# EAGLE board display (EAGLE 4.16)
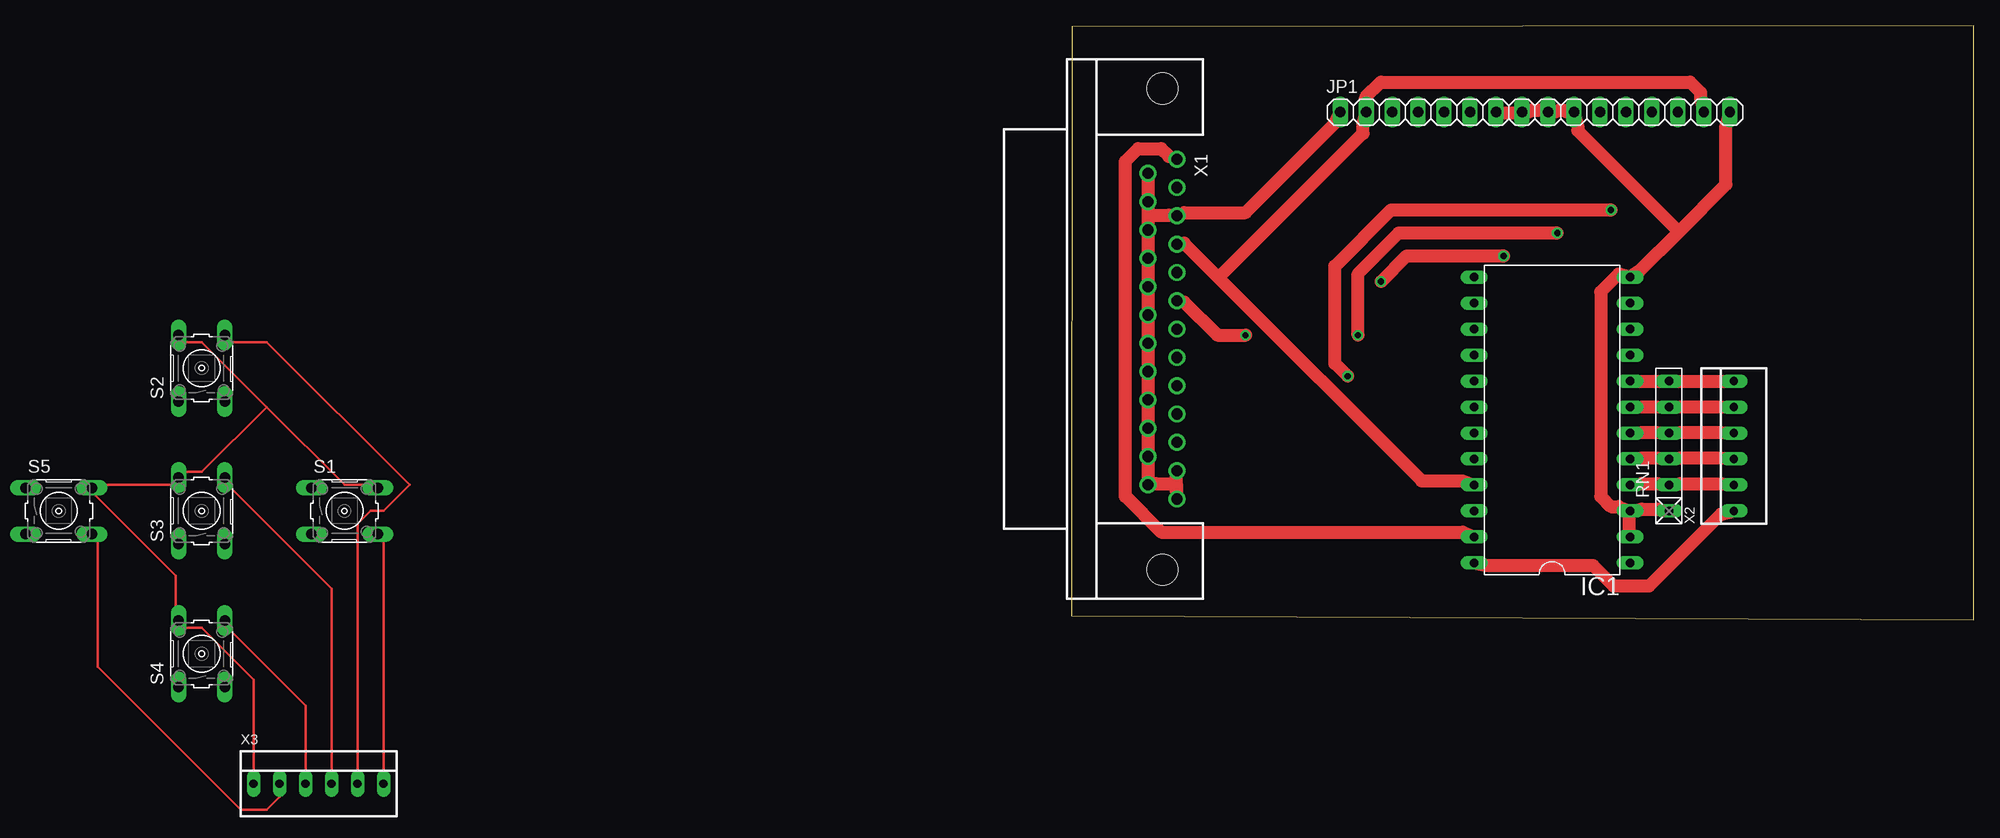
[diagram p0: board, top side]
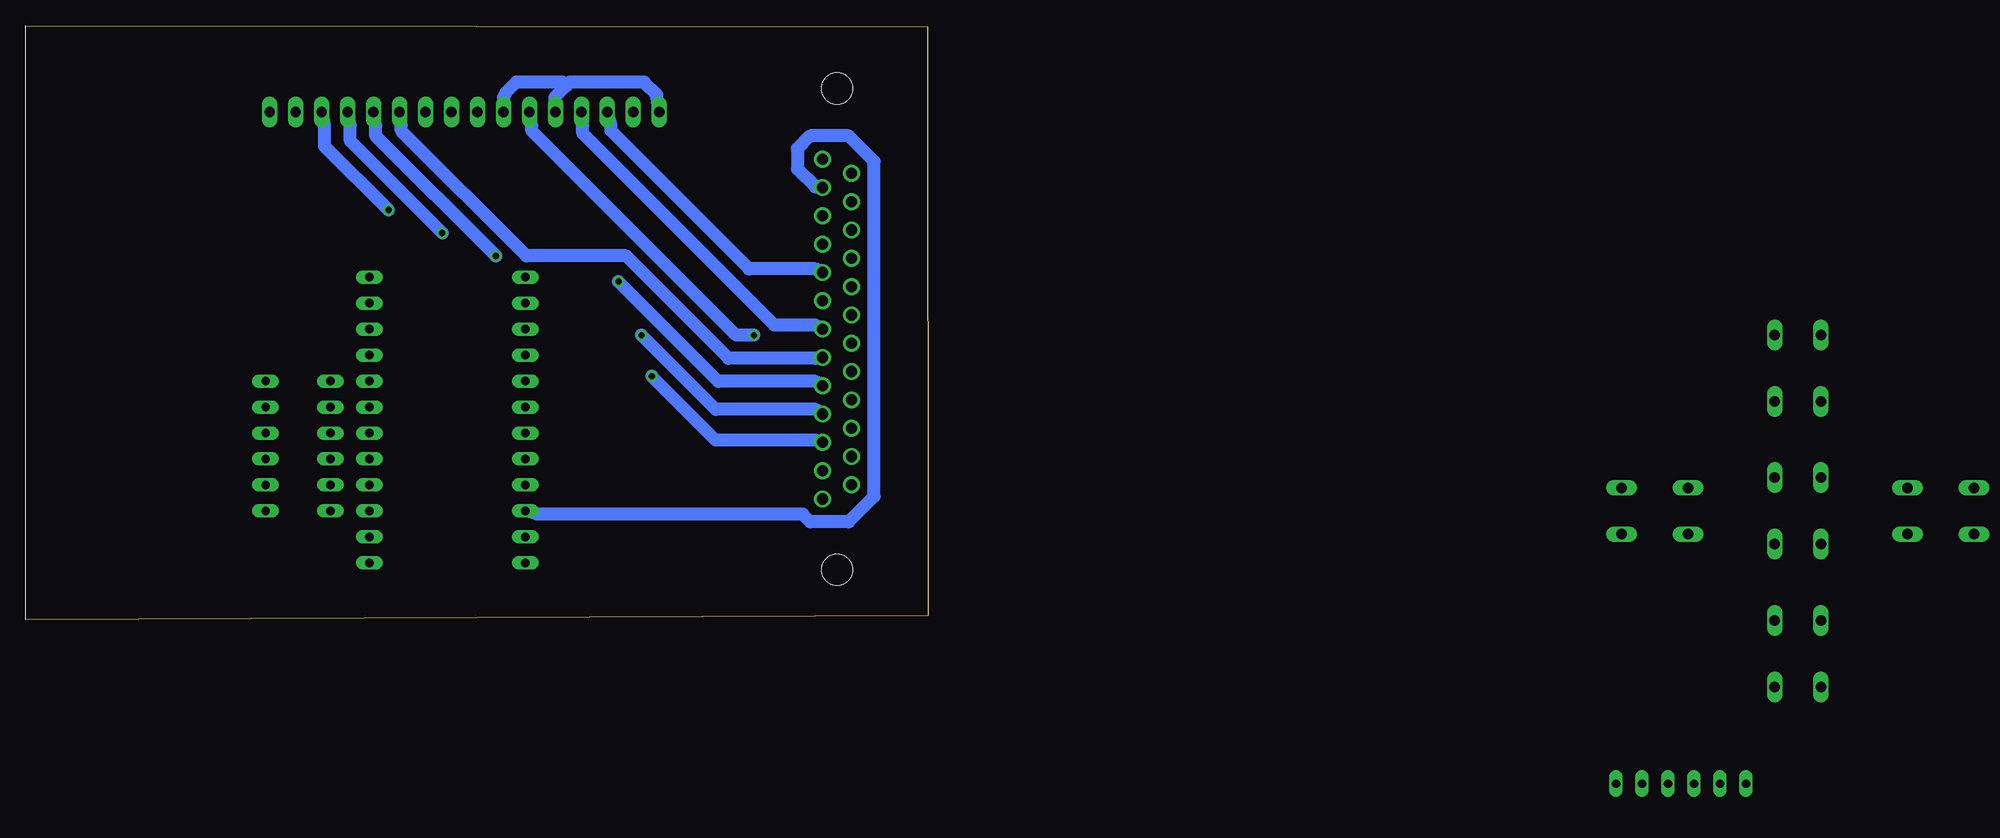
[diagram p1: board, bottom side, seen from below]

Size 88.28 x 58.09 mm. Coordinates in mm from the lower left corner, seen from the top.
Outline: 0,0.4 88.28,0 88.28,58.09 0.07,57.99 0,0.4
Copper layers (1*16): Top 0.035mm / dielectric 1.5mm / Bottom 0.035mm
Design rules "default": minimum track width 50mil, minimum drill 24mil, track to track 30mil, track to pad 30mil, pad to pad 30mil, via to via 30mil, smd to smd 20mil, copper to edge 20mil, drill to drill 20mil, minimum pad ring 10mil, minimum via ring 8mil, stop-mask expansion 4mil, vias tented up to drill 0mil, thermal gap 20mil

## Footprints (pad centres in the part's own frame; a part is rotated, then mirrored left to right if it is on the bottom)
DIL24-6 = drill 0.813 long: 1 -13.97,-7.62; 2 -11.43,-7.62; 3 -8.89,-7.62; 4 -6.35,-7.62; 5 -3.81,-7.62; 6 -1.27,-7.62; 7 1.27,-7.62; 8 3.81,-7.62; 9 6.35,-7.62; 10 8.89,-7.62; 11 11.43,-7.62; 12 13.97,-7.62; 13 13.97,7.62; 14 11.43,7.62; 15 8.89,7.62; 16 6.35,7.62; 17 3.81,7.62; 18 1.27,7.62; 19 -1.27,7.62; 20 -3.81,7.62; 21 -6.35,7.62; 22 -8.89,7.62; 23 -11.43,7.62; 24 -13.97,7.62
1X16 = drill 1.016 long: 1 -19.05,0; 2 -16.51,0; 3 -13.97,0; 4 -11.43,0; 5 -8.89,0; 6 -6.35,0; 7 -3.81,0; 8 -1.27,0; 9 1.27,0; 10 3.81,0; 11 6.35,0; 12 8.89,0; 13 11.43,0; 14 13.97,0; 15 16.51,0; 16 19.05,0
RN-6 = drill 0.813 long: 1 -6.35,0; 2 -3.81,0; 3 -1.27,0; 4 1.27,0; 5 3.81,0; 6 6.35,0
B3F-10XX = drill 1.016 long: 1 -3.251,2.261; 2 3.251,2.261; 3 -3.251,-2.261; 4 3.251,-2.261
H3M25RA = drill 1.092 round: 1 -16.612,1.422; 2 -13.843,1.422; 3 -11.074,1.422; 4 -8.306,1.422; 5 -5.537,1.422; 6 -2.769,1.422; 7 0,1.422; 8 2.769,1.422; 9 5.537,1.422; 10 8.306,1.422; 11 11.074,1.422; 12 13.843,1.422; 13 16.612,1.422; 14 -15.227,-1.422; 15 -12.459,-1.422; 16 -9.69,-1.422; 17 -6.921,-1.422; 18 -4.153,-1.422; 19 -1.384,-1.422; 20 1.384,-1.422; 21 4.153,-1.422; 22 6.921,-1.422; 23 9.69,-1.422; 24 12.459,-1.422; 25 15.227,-1.422 | hole 3.048: -23.52,0; 23.52,0
22-23-2061 = drill 0.813 long: 1 -6.35,0; 2 -3.81,0; 3 -1.27,0; 4 1.27,0; 5 3.81,0; 6 6.35,0

## Placement (x,y rotation side)
IC1  PCA9555N  [DIL24-6]  47.02,19.52 90 top
JP1  [1X16]  45.35,49.63 0 top
RN1  [RN-6]  58.45,16.98 90 top
S1  [B3F-10XX]  -71.09,10.63 0 top  (outside the outline)
S2  [B3F-10XX]  -85.06,24.6 90 top  (outside the outline)
S3  [B3F-10XX]  -85.06,10.63 90 top  (outside the outline)
S4  [B3F-10XX]  -85.06,-3.34 90 top  (outside the outline)
S5  [B3F-10XX]  -99.03,10.63 0 top  (outside the outline)
X1  D-SUB25-H3M25RA  [H3M25RA]  8.92,28.41 270 top
X2  [22-23-2061]  64.8,16.98 90 top
X3  [22-23-2061]  -73.63,-16.04 0 top  (outside the outline)

## Library data of the parts
IC1 = micro-philips
JP1 = pinhead
RN1 = resistor-net
S1-S5 = switch-omron
X1 = con-thomas-betts
X2 X3 = con-molex

## Nets
+5V: IC1.24 X2.1
CONTRASTO: JP1.3 X1.5
DATA4: JP1.11 X1.8
DATA5: JP1.12 X1.9
DATA6: JP1.13 X1.10
DATA7: JP1.14 X1.11
E: JP1.6 X1.6
GND: IC1.2 IC1.3 IC1.12 JP1.1 JP1.5 JP1.7 JP1.8 JP1.9 JP1.10 JP1.16 RN1.1 X1.3 X1.12 X1.13 X1.14 X1.15 X1.16 X1.17 X1.18 X1.19 X1.20 X1.21 X1.22 X1.23 X1.24 X1.25
N$1: S1.2 S2.2 S3.2 S4.2 S5.2 X3.1
N$5: S5.4 X3.2
N$6: S4.4 X3.3
N$7: S3.4 X3.4
N$8: S2.4 X3.5
N$9: S1.4 X3.6
N$23: IC1.4 RN1.2 X2.2
N$30: IC1.5 RN1.3 X2.3
N$44: IC1.6 RN1.4 X2.4
N$45: IC1.7 RN1.5 X2.5
N$46: IC1.8 RN1.6 X2.6
RS: JP1.4 X1.7
SCL: IC1.22 X1.2
SDA: IC1.23 X1.1
VCC: IC1.21 JP1.2 JP1.15 X1.4

## Tracks (layer width: path | path; a pad name or v marks a point on that pad's centre or on a via)
+5V
  Top 1.27: IC1.24 40.53,5.31 51.03,5.31 53.03,3.31 56.53,3.31 63.53,10.31 X2.1
CONTRASTO
  Bottom 1.27: JP1.3 31.03,48.31 31.03,47.81 17.53,34.31 11.03,34.31 X1.5
DATA4
  Bottom 1.27: JP1.11 51.53,48.31 51.53,47.81 39.28,35.56 29.53,35.56 19.53,25.56 11.03,25.56 X1.8
DATA5  (via drill 0.61)
  Top 1.27: v42.28,35.56 32.78,35.56 v30.28,33.06
  Bottom 1.27: v42.28,35.56 54.03,47.31 54.03,48.31 JP1.12 | v30.28,33.06 20.53,23.31 11.03,23.31 X1.9
DATA6  (via drill 0.61)
  Top 1.27: v47.53,37.81 32.03,37.81 28.03,33.81 v28.03,27.81
  Bottom 1.27: v47.53,37.81 56.53,46.81 56.53,48.31 JP1.13 | v28.03,27.81 20.78,20.56 11.03,20.56 X1.10
DATA7  (via drill 0.61)
  Top 1.27: v52.78,40.06 31.28,40.06 25.78,34.56 25.78,25.06 v27.03,23.81
  Bottom 1.27: v52.78,40.06 59.03,46.31 59.03,48.31 JP1.14 | v27.03,23.81 20.78,17.56 11.03,17.56 X1.11
E  (via drill 0.61)
  Top 1.27: v17.03,27.81 14.28,27.81 11.03,31.06 X1.6
  Bottom 1.27: v17.03,27.81 18.78,27.81 38.78,47.81 38.78,48.31 JP1.6
GND
  Top 1.27: JP1.7 42.28,49.56 43.53,49.56 JP1.8 44.53,49.56 45.03,49.81 45.78,49.81 46.38,50 JP1.9 47.33,49.66 47.78,49.81 48.53,49.81 | 10.28,13.31 10.28,13.81 X1.12 | 10.28,13.31 10.28,12.56 X1.13 | 10.28,13.31 8.28,13.31 X1.25 7.53,13.81 7.53,15.31 X1.24 7.53,16.56 7.53,18.06 X1.23 7.53,19.31 7.53,20.81 X1.22 7.53,22.06 7.53,23.56 X1.21 7.53,25.06 7.53,26.31 X1.20 7.53,27.81 7.53,29.06 X1.19 7.53,30.56 7.53,31.81 X1.18 7.53,33.31 7.53,34.56 X1.17 7.53,36.06 7.53,37.31 X1.16 7.53,38.81 7.53,39.56 | 7.53,39.56 7.53,40.06 X1.15 7.53,41.56 7.53,43.06 X1.14 | 7.53,39.56 9.53,39.56 X1.3 11.03,39.81 17.03,39.81 25.78,48.56 JP1.1 | IC1.3 54.78,10.56 54.53,10.06 54.53,8.56 54.78,8.06 IC1.2 | IC1.3 55.78,10.81 57.28,10.81 RN1.1 | 48.53,49.81 48.43,49.66 | 48.53,49.81 JP1.10 49.53,48.31 49.53,47.81 59.41,37.94 | IC1.3 53.53,11.06 52.78,11.06 51.78,12.06 51.78,32.06 53.53,33.81 IC1.12 55.53,34.06 59.41,37.94 | 59.41,37.94 64.03,42.56 64.03,48.31 JP1.16
  Bottom 1.27: JP1.7 41.53,51.06 41.28,51.56 40.28,52.56 35.78,52.56 35.41,52.19 | 35.41,52.19 36.53,51.06 JP1.5 | 35.41,52.19 35.03,52.56 27.78,52.56 26.53,51.31 26.53,51.06 JP1.1
N$1
  Top 0.254: X3.1 -79.98,-5.88 -85.06,-0.8 -87.6,-0.8 S4.2 -87.6,0.47 -87.6,4.28 -96.49,13.17 S5.2 -95.22,13.17 -87.6,13.17 S3.2 -87.6,14.44 -85.06,14.44 -78.71,20.79 | -78.71,20.79 -85.06,27.14 -87.6,27.14 S2.2 | -78.71,20.79 -71.09,13.17 -68.55,13.17 S1.2
N$5
  Top 0.254: X3.2 -77.44,-17.31 -78.71,-18.58 -81.25,-18.58 -95.22,-4.61 -95.22,8.09 S5.4
N$6
  Top 0.254: X3.3 -74.9,-8.42 -82.52,-0.8 S4.4
N$7
  Top 0.254: X3.4 -72.36,3.01 -82.52,13.17 S3.4
N$8
  Top 0.254: X3.5 -69.82,9.36 -68.55,10.63 -67.28,10.63 -64.74,13.17 -78.71,27.14 -82.52,27.14 S2.4
N$9
  Top 0.254: X3.6 -67.28,8.09 S1.4
N$23
  Top 1.27: IC1.4 55.78,13.31 57.28,13.31 RN1.2 59.53,13.31 63.53,13.31 X2.2
N$30
  Top 1.27: X2.3 63.53,15.81 59.53,15.81 RN1.3 57.28,15.81 55.78,15.81 IC1.5
N$44
  Top 1.27: IC1.6 55.78,18.31 57.28,18.31 RN1.4 59.53,18.31 63.53,18.31 X2.4
N$45
  Top 1.27: 55.28,20.81 IC1.7 55.78,20.81 57.28,20.81 RN1.5 59.53,20.81 63.53,20.81 X2.5
N$46
  Top 1.27: IC1.8 55.78,23.31 57.28,23.31 RN1.6 59.53,23.31 63.53,23.31 X2.6
RS
  Bottom 1.27: JP1.4 33.78,48.31 33.78,47.56 15.03,28.81 11.03,28.81 X1.7
SCL
  Bottom 1.27: IC1.22 38.28,10.31 12.28,10.31 11.53,9.56 7.78,9.56 5.28,12.06 5.28,44.81 7.78,47.31 11.53,47.31 12.78,46.06 12.78,44.06 11.03,42.31 X1.2
SDA
  Top 1.27: IC1.23 38.28,8.56 8.78,8.56 5.28,12.06 5.28,44.81 6.53,46.06 8.78,46.06 9.53,45.31 X1.1
VCC
  Top 1.27: 14.4,33.44 11.03,36.81 X1.4 | 14.4,33.44 34.28,13.56 38.28,13.56 IC1.21 | 14.4,33.44 28.53,47.56 28.53,48.31 JP1.2 28.78,51.06 30.28,52.56 60.53,52.56 61.53,51.56 61.53,51.06 JP1.15